# EAGLE board SIM808 (EAGLE 9.6.0)

Size 118.09 x 69.52 mm. Coordinates in mm from the lower left corner, seen from the top.
Outline: 0,0 118.09,0 116.82,69.52 0,69.52 0,0
Copper layers (1*16): Top 0.035mm / dielectric 1.5mm / Bottom 0.035mm
Design rules "default": minimum track width 6mil, minimum drill 0.35mm, track to track 6mil, track to pad 6mil, pad to pad 6mil, via to via 6mil, smd to smd 6mil, copper to edge 40mil, drill to drill 6mil, minimum pad ring 10mil, minimum via ring 8mil, stop-mask expansion 4mil, vias tented up to drill 0mil, thermal gap 10mil

## Footprints (pad centres in the part's own frame; a part is rotated, then mirrored left to right if it is on the bottom)
C0805 = smd 1.3 x 1.5: 1 -0.95,0; 2 0.95,0
C0805K = smd 1.3 x 1.6: 1 -1,0; 2 1,0
USB-MINIB = smd 0.5 x 2.308: D+ 0,4.064; D- -0.8,4.064; GND 1.6,4.064; ID 0.8,4.064; VBUS -1.6,4.064 | smd 2 x 2.4: GND1 -4.4,-2; GND2 -4.4,3.5; GND3 4.4,3.5; GND4 4.4,-2 | hole 1: -2.2,1; 2.2,1
SOD323_ST = smd 0.8 x 0.6: A 1.25,0; C -1.25,0
SC70-6 = smd 0.35 x 0.8: 1 -0.65,-0.95; 2 0,-0.95; 3 0.65,-0.95; 4 0.65,0.95; 5 0,0.95; 6 -0.65,0.95
SOT223 = smd 1.5 x 2: 1 -2.3,-3.15; 2 0,-3.15; 3 2.3,-3.15 | smd 3.8 x 2: 4 0,3.15
TQFP44 = smd 1.5 x 0.5: 1 -5.8,4; 2 -5.8,3.2; 3 -5.8,2.4; 4 -5.8,1.6; 5 -5.8,0.8; 6 -5.8,0; 7 -5.8,-0.8; 8 -5.8,-1.6; 9 -5.8,-2.4; 10 -5.8,-3.2; 11 -5.8,-4; 23 5.8,-4; 24 5.8,-3.2; 25 5.8,-2.4; 26 5.8,-1.6; 27 5.8,-0.8; 28 5.8,0; 29 5.8,0.8; 30 5.8,1.6; 31 5.8,2.4; 32 5.8,3.2; 33 5.8,4 | smd 0.5 x 1.5: 12 -4,-5.8; 13 -3.2,-5.8; 14 -2.4,-5.8; 15 -1.6,-5.8; 16 -0.8,-5.8; 17 0,-5.8; 18 0.8,-5.8; 19 1.6,-5.8; 20 2.4,-5.8; 21 3.2,-5.8; 22 4,-5.8; 34 4,5.8; 35 3.2,5.8; 36 2.4,5.8; 37 1.6,5.8; 38 0.8,5.8; 39 0,5.8; 40 -0.8,5.8; 41 -1.6,5.8; 42 -2.4,5.8; 43 -3.2,5.8; 44 -4,5.8
AVRISP-BOX = drill 0.9 pad 1.626: 1 -1.397,2.54; 2 1.397,2.54; 3 -1.143,0; 4 1.143,0; 5 -1.397,-2.54; 6 1.397,-2.54
HRS_U.FL-R-SMT(01) = smd 1.1 x 2.25: 1 -1.475,0; 2 1.475,0 | smd 1.05 x 1.1: 3 0,-1.55
SML0805 = smd 1.2 x 1.2: A 1.05,0; C -1.05,0
CSM-7X-DU = smd 5.5 x 2: 1 -4.75,0; 2 4.75,0
R0805 = smd 1.3 x 1.5: 1 -0.95,0; 2 0.95,0
TE_1825910-2 = drill 0.99 square: 1 0,0 | drill 0.99: 2 6.5,0; 3 0,-4.5; 4 6.5,-4.5
SIM900_SMT = smd 2 x 0.6: P$1 -12.4,8; P$2 -12.4,7; P$3 -12.4,6; P$4 -12.4,5; P$5 -12.4,4; P$6 -12.4,3; P$7 -12.4,2; P$8 -12.4,1; P$9 -12.4,0; P$10 -12.4,-1; P$11 -12.4,-2; P$12 -12.4,-3; P$13 -12.4,-4; P$14 -12.4,-5; P$15 -12.4,-6; P$16 -12.4,-7; P$17 -12.4,-8; P$35 12.4,-8; P$36 12.4,-7; P$37 12.4,-6; P$38 12.4,-5; P$39 12.4,-4; P$40 12.4,-3; P$41 12.4,-2; P$42 12.4,-1; P$43 12.4,0; P$44 12.4,1; P$45 12.4,2; P$46 12.4,3; P$47 12.4,4; P$48 12.4,5; P$49 12.4,6; P$50 12.4,7; P$51 12.4,8 | smd 0.6 x 2: P$18 -8,-12.4; P$19 -7,-12.4; P$20 -6,-12.4; P$21 -5,-12.4; P$22 -4,-12.4; P$23 -3,-12.4; P$24 -2,-12.4; P$25 -1,-12.4; P$26 0,-12.4; P$27 1,-12.4; P$28 2,-12.4; P$29 3,-12.4; P$30 4,-12.4; P$31 5,-12.4; P$32 6,-12.4; P$33 7,-12.4; P$34 8,-12.4; P$52 8,12.4; P$53 7,12.4; P$54 6,12.4; P$55 5,12.4; P$56 4,12.4; P$57 3,12.4; P$58 2,12.4; P$59 1,12.4; P$60 0,12.4; P$61 -1,12.4; P$62 -2,12.4; P$63 -3,12.4; P$64 -4,12.4; P$65 -5,12.4; P$66 -6,12.4; P$67 -7,12.4; P$68 -8,12.4
SOP65P640X120-14N = smd 1.473 x 0.356: 1 -2.921,1.956; 2 -2.921,1.295; 3 -2.921,0.66; 4 -2.921,0; 5 -2.921,-0.66; 6 -2.921,-1.295; 7 -2.921,-1.956; 8 2.921,-1.956; 9 2.921,-1.295; 10 2.921,-0.66; 11 2.921,0; 12 2.921,0.66; 13 2.921,1.295; 14 2.921,1.956
SOT95P280X145-5N = smd 1.22 x 0.6: 1 -1.245,0.95; 2 -1.245,0; 3 -1.245,-0.95; 4 1.245,-0.95; 5 1.245,0.95
J502-ND-142-0701-801/806 = smd 5.08 x 2.286: 1 2.565,0; G@1 2.565,4.42; G@2 2.565,-4.42 | smd 5.08 x 2.286 bottom: G@3 2.565,4.42; G@4 2.565,-4.42
5036_006_201_862 = smd 1.9 x 0.95: C1 -19.55,2.98; C2 -19.55,0.44; C3 -19.55,-2.1; C5 -19.55,1.71; C6 -19.55,-0.83; C7 -19.55,-3.37; C/D@1 -19.55,-4.64; C/D@2 -19.55,-5.91

## Placement (x,y rotation side)
C1  10uF  [C0805]  15.24,41.91 0 top
C2  10uF  [C0805]  15.24,36.83 0 top
C3  100uF  [C0805]  20.32,41.91 0 top
C4  33pF  [C0805]  20.32,36.83 0 top
C5  100PF  [C0805]  25.4,41.91 0 top
C6  22pF  [C0805K]  95.25,26.67 0 top
C7  22pF  [C0805K]  77.47,25.4 0 top
CN1  [USB-MINIB]  5.08,43.18 270 top
D1  BAT60J  [SOD323_ST]  25.4,36.83 0 top
D2  SMF05C  [SC70-6]  73.66,3.81 0 top
IC1  LM1117S  [SOT223]  33.02,34.29 0 top
IC2  MEGA32-A  [TQFP44]  87.63,17.78 270 top
ISP1  AVRISP-BOX  [AVRISP-BOX]  105.41,21.59 0 top
J1  U.FL-R-SMT(01)  [HRS_U.FL-R-SMT(01)]  83.82,5.08 0 top
LED1  [SML0805]  33.02,22.86 0 top
LED2  [SML0805]  33.02,20.32 0 top
LED3  [SML0805]  33.02,17.78 0 top
LED4  [SML0805]  33.02,15.24 0 top
LED5  [SML0805]  77.47,8.89 0 top
Q1  CSM-7X-DU  [CSM-7X-DU]  87.63,30.48 0 top
R1  470ohm  [R0805]  33.02,12.7 0 top
R2  1K  [R0805]  33.02,10.16 0 top
R3  10K  [R0805]  2.54,3.81 0 top
R4  220ohm  [R0805]  33.02,7.62 0 top
R5  220ohm  [R0805]  33.02,3.81 0 top
R6  220ohm  [R0805]  33.02,26.67 0 top
SW1  1825910-2  [TE_1825910-2]  69.85,43.18 0 top
SW2  1825910-2  [TE_1825910-2]  82.55,43.18 0 top
U1  [SIM900_SMT]  15.24,19.05 0 top
U2  SN74ABT125PW  [SOP65P640X120-14N]  41.91,30.48 270 top
U$1  MCP73811T-420I/OT  [SOT95P280X145-5N]  33.02,41.91 0 top
X1  SMA-142-0701-801/806  [J502-ND-142-0701-801/806]  100.33,5.08 90 top
X2  5036_006_201_862  [5036_006_201_862]  12.7,7.62 270 bottom

## Library data of the parts
C1-C7 = rcl; SPICEPREFIX: C
CN1 ISP1 U1 = adafruit
D1 = diode
D2 = SMF05C; AVAILABILITY: Unavailable; DESCRIPTION: 12.5V Clamp 8A _8/20µs_ Ipp Tvs Diode Surface Mount SC-88/SC70-6/SOT-363; MF: ProTek Devices; MP: SMF05C; PACKAGE: TSSOP-6 ProTek Devices; PRICE: None
IC1 = LM1117; AVAILABILITY: Unavailable; DESCRIPTION: Linear Voltage Regulator IC 1 Output 800mA SOT-223-4; MF: Texas Instruments; MP: LM1117; PACKAGE: SOT-223-4 Texas Instruments; PRICE: None
IC2 = atmel; MPN: ATMEGA32-16AU; OC_FARNELL: 9171274; OC_NEWARK: 69K6677
J1 = U.FL-R-SMT_01_; AVAILABILITY: Unavailable; DESCRIPTION: U.FL _UMCC_ Connector Receptacle, Male Pin 50Ohm Surface Mount Solder; MF: Hirose; MP: U.FL-R-SMT_01_; PACKAGE: None; PRICE: None
LED1-LED5 = led
Q1 = crystal; OC_FARNELL: unknown; OC_NEWARK: unknown
R1-R6 = rcl; SPICEPREFIX: R
SW1 SW2 = 1825910-2; AVAILABILITY: Unavailable; COMMENT: 1825910-2; CONFIGURATION_POLE-THROW: Single Pole - Single Throw; CONTACT_CURRENT_RATING: 50 mA; DESCRIPTION: 50 mA SPST Round Actuator 160 Gram Force Tactile Pushbutton Switch; EU_ROHS_COMPLIANCE: Compliant; MF: TE Connectivity; MP: 1825910-2; PACKAGE: None; PRICE: None; TE_PURCHASE_URL: https://www.te.com/usa-en/product-1825910-2.html?te_bu=Cor&te_type=disp&te_campaign=seda_glo_cor-seda-global-disp-prtnr-fy19-seda-model-bom-cta_sma-317_1&elqCampaignId=32493
U2 = SN74ABT125PW; AVAILABILITY: Unavailable; DESCRIPTION: Buffer, Non-Inverting 4 Element 1 Bit per Element 3-State Output 14-TSSOP; MF: Texas Instruments; MP: SN74ABT125PW; PACKAGE: TSSOP-14 Texas Instruments; PRICE: None
U$1 = MCP73811T-420I_OT; AVAILABILITY: Unavailable; DESCRIPTION: Charger IC Lithium Ion/Polymer SOT-23-5; MF: Microchip; MP: MCP73811T-420I/OT; PACKAGE: SOT-23 Microchip; PRICE: None
X1 = con-coax; MF: JOHNSON COMPONENTS; MPN: 142-0701-801; OC_FARNELL: 1608592; OC_NEWARK: 90F2624
X2 = con-kyocera-elco; OC_FARNELL: unknown; OC_NEWARK: unknown

## Nets
1.8V: D2.1 U1.P$29 X2.C1
2.8V: R3.1 U1.P$7
3V3: IC1.2 IC1.4
+5V: C1.1 CN1.VBUS IC1.3 IC2.5 IC2.17 IC2.27 IC2.29 IC2.38 ISP1.2 LED1.A U1.P$25 U2.14 U$1.4
GND: C1.2 C2.2 C3.2 C4.2 C5.2 C6.2 C7.2 CN1.GND CN1.ID D1.A D2.2 IC1.1 IC2.6 IC2.18 IC2.28 IC2.39 ISP1.6 J1.1 J1.2 R2.1 R4.2 R5.2 R6.2 SW1.3 SW1.4 SW2.3 SW2.4 U1.P$1 U1.P$2 U1.P$3 U1.P$18 U1.P$28 U1.P$34 U1.P$36 U1.P$40 U1.P$51 U1.P$52 U1.P$54 U1.P$64 U1.P$65 U1.P$67 U1.P$68 U2.1 U2.4 U2.7 U2.10 U2.13 U$1.1 U$1.2 X1.G@1 X1.G@2 X1.G@3 X1.G@4 X2.C5
GSM_RST: SW1.1 SW1.2 U1.P$16
GSM_RXD: IC2.10 U1.P$15
GSM_TXD: U1.P$14 U2.2
GSM_TXD_5V: IC2.9 U2.3
MISO: IC2.2 ISP1.1
MOSI: IC2.1 ISP1.4
N$1: LED2.A R1.2 U$1.5
N$2: LED2.C R2.2
N$3: LED1.C R1.1
N$4: C2.1 U1.P$17
N$5: U1.P$66 X1.1
N$6: J1.3 U1.P$35
N$7: LED5.C R6.1
N$8: R3.2 U1.P$13
N$9: LED4.C R5.1
N$10: LED3.C R4.1
N$11: C6.1 IC2.7 Q1.2
N$12: C7.1 IC2.8 Q1.1
NETSTAT: U1.P$50 U2.5
NETSTAT_5V: LED3.A U2.6
PWRKEY: U1.P$8
PWRSTAT: U1.P$49 U2.9
PWRSTAT_5V: LED4.A U2.8
RESET: IC2.4 ISP1.5 SW2.1 SW2.2
RING: U1.P$10 U2.12
RING_5V: LED5.A U2.11
SCK: IC2.3 ISP1.3
SIM_CLK: D2.4 U1.P$31 X2.C3
SIM_DATA: D2.3 U1.P$30 X2.C7
SIM_RST: D2.5 U1.P$32 X2.C2
USB_D+: CN1.D+ U1.P$26
USB_D-: CN1.D- U1.P$27
VBAT: C3.1 C4.1 C5.1 D1.C U1.P$4 U1.P$5 U1.P$6 U$1.3

## Tracks (layer width: path | path; a pad name or v marks a point on that pad's centre or on a via)
1.8V  (2 unrouted)
2.8V  (1 unrouted)
3V3  (1 unrouted)
+5V  (12 unrouted)
GND  (53 unrouted)
GSM_RST  (2 unrouted)
GSM_RXD  (1 unrouted)
GSM_TXD  (1 unrouted)
GSM_TXD_5V  (1 unrouted)
MISO  (1 unrouted)
MOSI  (1 unrouted)
N$1  (2 unrouted)
N$2  (1 unrouted)
N$3  (1 unrouted)
N$4  (1 unrouted)
N$5  (1 unrouted)
N$6  (1 unrouted)
N$7  (1 unrouted)
N$8  (1 unrouted)
N$9  (1 unrouted)
N$10  (1 unrouted)
N$11  (2 unrouted)
N$12  (2 unrouted)
NETSTAT  (1 unrouted)
NETSTAT_5V  (1 unrouted)
PWRSTAT  (1 unrouted)
PWRSTAT_5V  (1 unrouted)
RESET  (3 unrouted)
RING  (1 unrouted)
RING_5V  (1 unrouted)
SCK  (1 unrouted)
SIM_CLK  (2 unrouted)
SIM_DATA  (2 unrouted)
SIM_RST  (2 unrouted)
USB_D+  (1 unrouted)
USB_D-  (1 unrouted)
VBAT  (7 unrouted)